# Altium PCB Power_Box_V0.PcbDoc (part 3 of 4)
Units mm, origin at the board's own origin, x right, y up, seen from the top; angles counter-clockwise.
Board outline 145 x 110 mm, 2 copper layers (Top Layer, Bottom Layer); 400 components, 300 nets, 1205 pads, 270 vias.
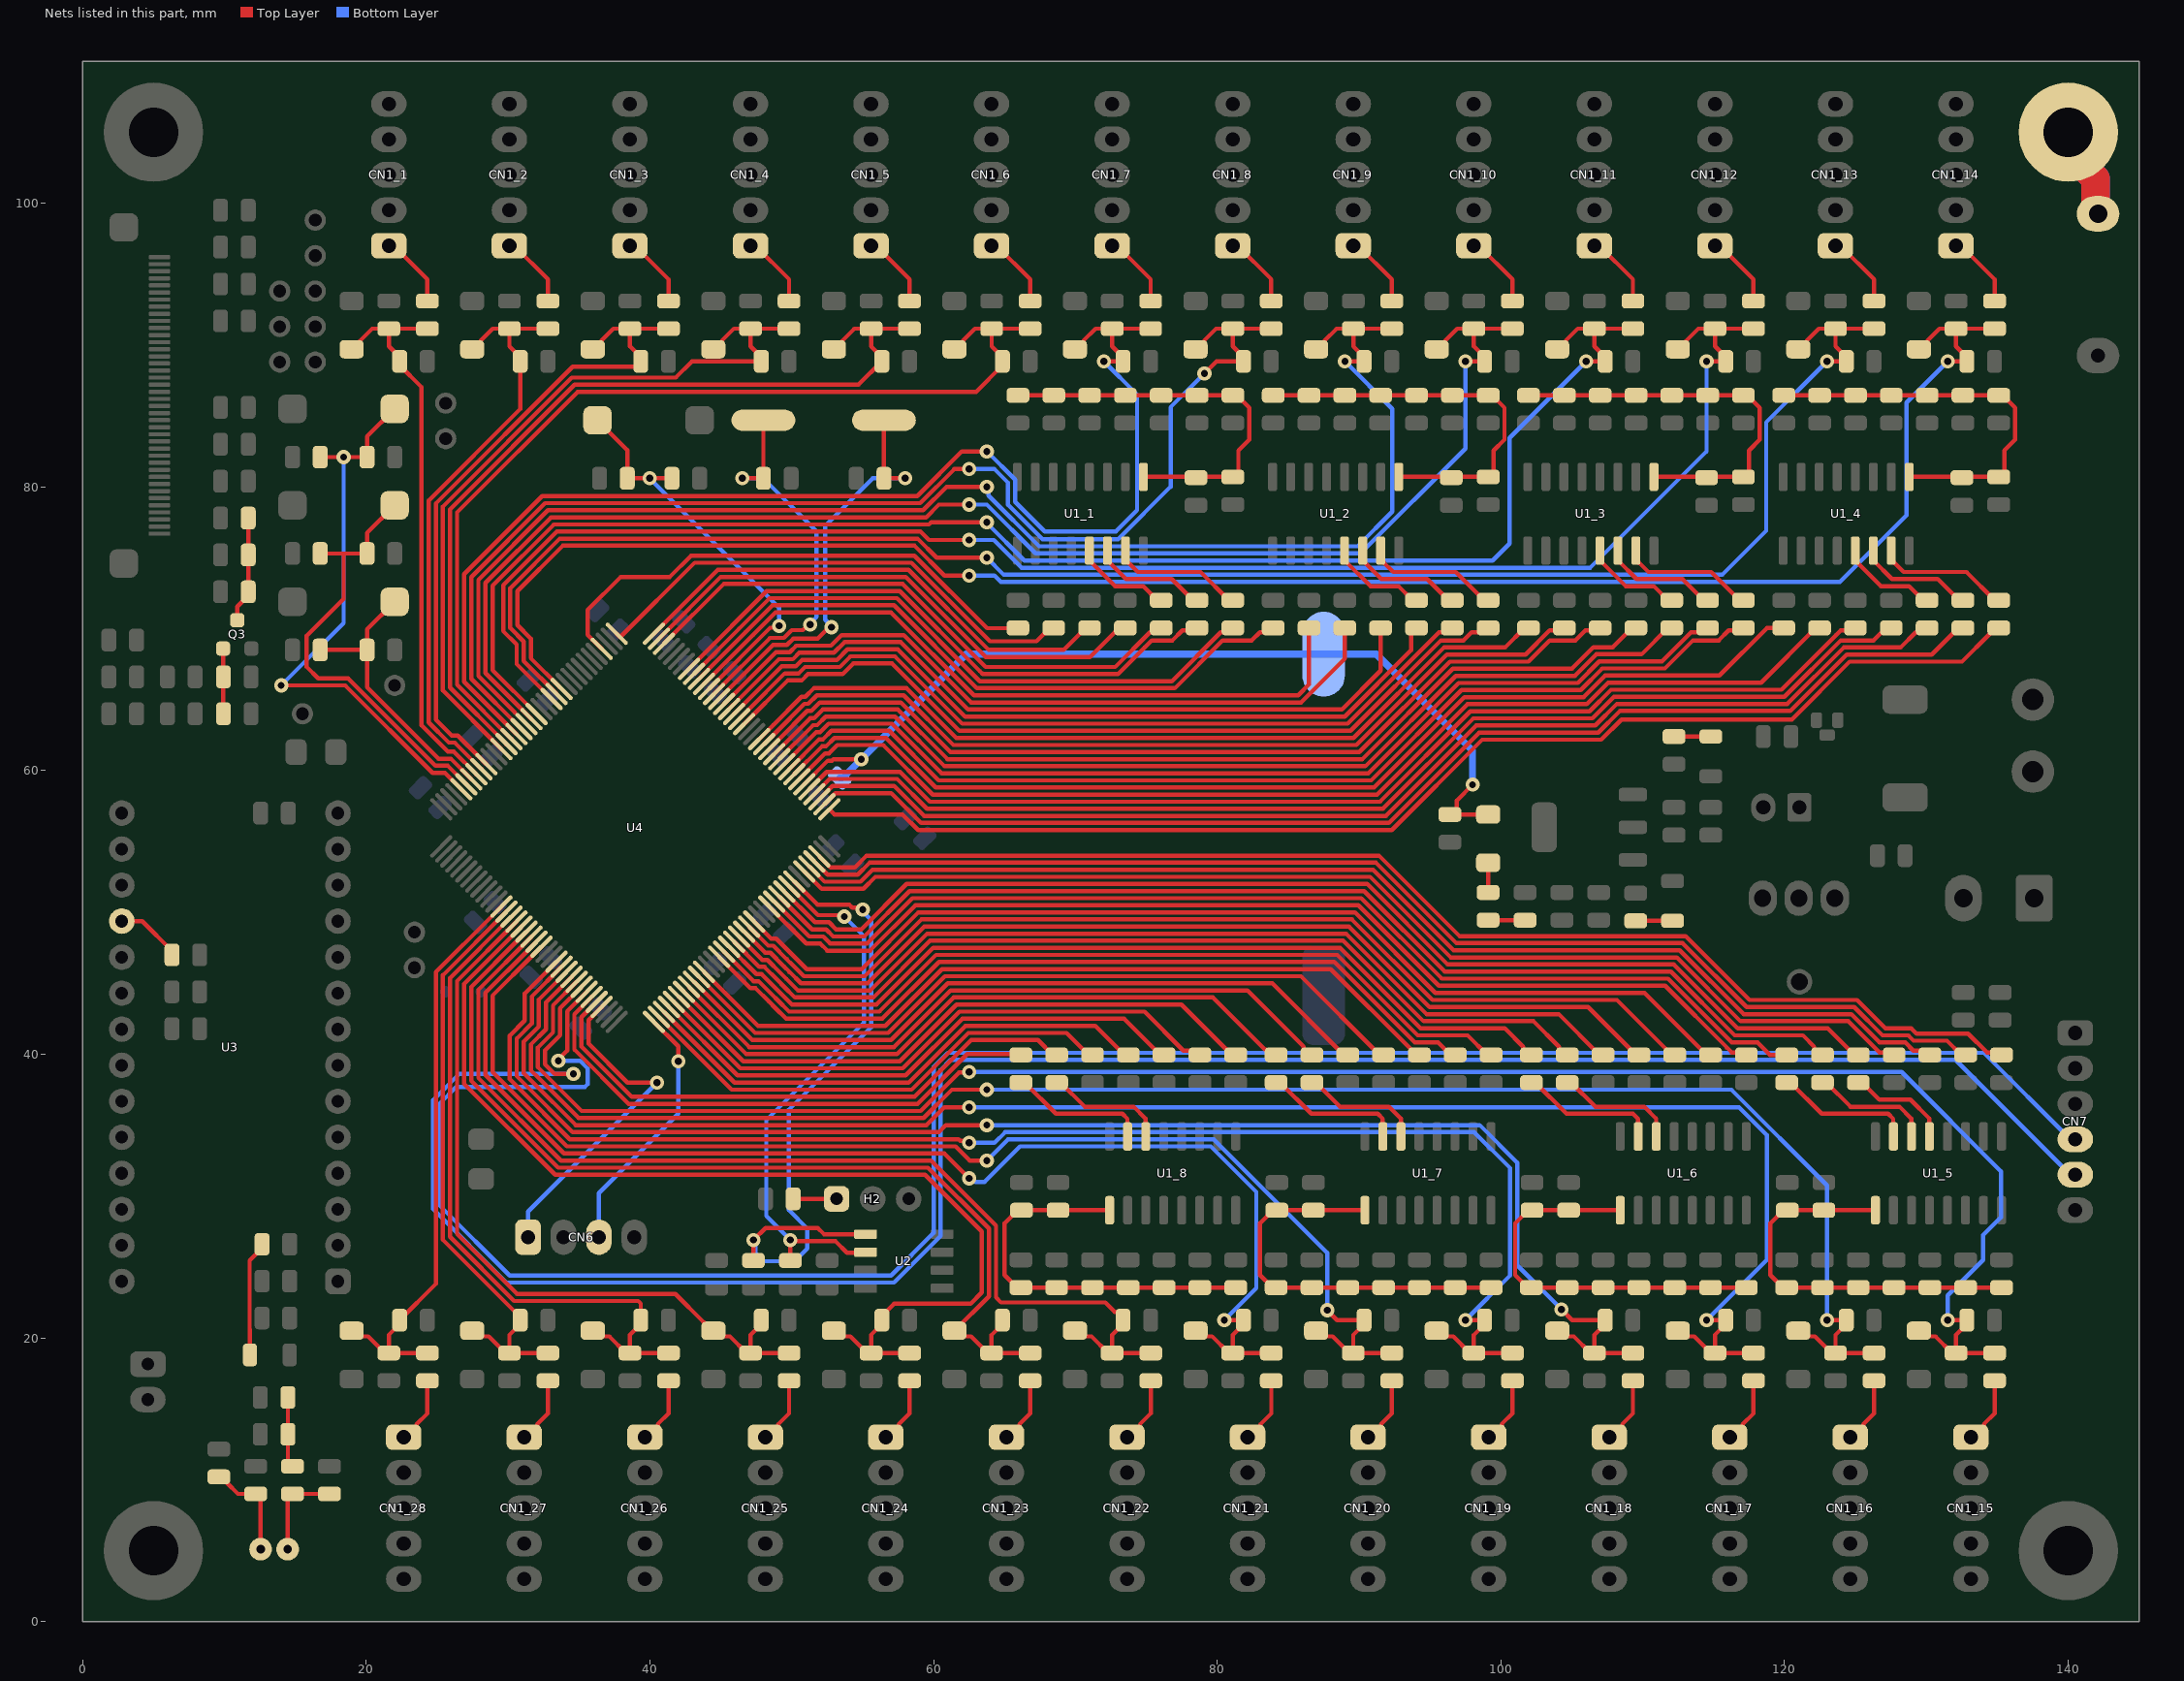
[diagram p3: the nets of this part, all layers, seen from the top]

## Via types
v1: diameter 1, hole 0.5, Top Layer to Bottom Layer, 270 vias

## Nets (pads, with @x,y where several pads share a name; then routed paths per layer and width w, separated by ;. In a path a pad name is that pad's centre, name@x,y a point inside that pad or via, vN(x,y) a via of type N, cw(c..) or ccw(c..) an arc to the next point about the centre after c; other vN are vias at no path point) (continued)
MCU_KEY1: C1_1.1 R1_1.2 S1_1.2 U4.68 | length 41.2
  Top Layer w0.3: v1(14,66) 18.509,66 24.675,59.835 25.545,59.835 U4.68@26.699,58.68 ; C1_1.1@16.75,82.1 v1(18.4,82.1) R1_1.2@20.05,82.1 20.05,83.55 S1_1.2@22,85.5
  Bottom Layer w0.3: v1(14,66) 18.4,70.4 v1(18.4,82.1)
MCU_KEY2: C1_2.1 R1_2.2 S1_2.2 U4.67 | length 31.3
  Top Layer w0.3: C1_2.1@16.75,75.3 18.4,75.3 ; S1_2.2@22,78.7 20.05,76.75 R1_2.2@20.05,75.3 18.4,75.3 ; U4.67@27.052,59.034 25.752,60.335 24.882,60.335 18.716,66.5 16.6,66.5 15.8,67.3 15.8,69.5 18.4,72.1 18.4,75.3
MCU_KEY3: C1_3.1 R1_3.2 S1_3.2 U4.66 | length 20.2
  Top Layer w0.3: C1_3.1@16.75,68.5 R1_3.2@20.05,68.5 ; S1_3.2@22,71.9 20.05,69.95 R1_3.2@20.05,68.5 ; U4.66@27.406,59.387 25.959,60.835 25.089,60.835 20.05,65.873 R1_3.2@20.05,68.5
MCU_LED1: R10_1.2 U4.37 | length 35.8
  Top Layer w0.3: U4.37@37.659,69.64 37.9,69.4 43.15,74.65 58.443,74.65 63.979,69.114 67.262,69.114 68.198,70.05 R10_1.2@68.473,70.05
MCU_LED2: R6_1.2 U4.35 | length 37.9
  Top Layer w0.3: U4.35@40.629,69.287 44.992,73.65 58.029,73.65 63.679,68 71.022,68 72.767,69.744 72.878,69.744 73.184,70.05 R6_1.2@73.524,70.05
MCU_LED3: R4_1.2 U4.29 | length 41.9
  Top Layer w0.3: U4.29@42.75,67.166 45.757,70.172 45.757,70.18 48.227,72.65 57.614,72.65 63.264,67 63.464,66.8 73.007,66.8 74.882,68.675 75.382,69.175 76.837,69.175 77.538,69.876 78.397,69.876 R4_1.2@78.571,70.05
MCU_LED4: R31_2.2 U4.27 | length 46.8
  Top Layer w0.3: U4.27@43.457,66.458 46.757,69.758 46.757,69.766 48.641,71.65 57.2,71.65 63.05,65.8 77.007,65.8 80.382,69.175 82.425,69.175 83,69.75 83.642,69.75 R31_2.2@83.942,70.05
MCU_LED5: R9_2.2 U4.22 | length 51.2
  Top Layer w0.3: U4.22@45.225,64.691 48.884,68.35 49.866,68.35 50.316,68.8 52.77,68.8 53.52,69.55 57.886,69.55 62.636,64.8 85.907,64.8 88.994,67.887 R9_2.2@88.994,70.05
MCU_LED6: R5_2.2 U4.20 | length 55.3
  Top Layer w0.3: U4.20@45.932,63.984 46.569,64.62 49.299,67.35 50.28,67.35 50.73,67.8 53.184,67.8 53.934,68.55 57.472,68.55 62.222,63.8 88.986,63.8 93.658,68.471 93.658,69.684 94.024,70.05 R5_2.2@94.045,70.05
MCU_LED7: R3_2.2 U4.18 | length 59.2
  Top Layer w0.3: U4.18@46.639,63.276 49.713,66.35 50.695,66.35 51.145,66.8 53.598,66.8 54.348,67.55 57.058,67.55 61.808,62.8 89.401,62.8 95.776,69.175 97.362,69.175 97.932,69.744 98.791,69.744 R3_2.2@99.097,70.05
MCU_LED8: R10_3.2 U4.14 | length 62.7
  Top Layer w0.3: U4.14@48.054,61.862 48.897,62.706 50.891,64.7 51.166,64.7 51.766,65.3 57.893,65.3 61.393,61.8 89.815,61.8 96.19,68.175 101.733,68.175 103.434,69.876 104.294,69.876 R10_3.2@104.468,70.05
MCU_LED9: R6_3.2 U4.12 | length 67.3
  Top Layer w0.3: U4.12@48.761,61.155 51.306,63.7 51.58,63.7 52.18,64.3 57.479,64.3 60.979,60.8 90.229,60.8 96.604,67.175 105.004,67.175 106.523,68.695 107.889,68.695 109.245,70.05 R6_3.2@109.52,70.05
MCU_LED10: R4_3.2 U4.10 | length 72
  Top Layer w0.3: U4.10@49.468,60.448 51.72,62.7 51.994,62.7 52.594,63.3 57.065,63.3 60.565,59.8 90.643,59.8 97.018,66.175 105.418,66.175 106.938,67.695 111.356,67.695 113.406,69.744 114.266,69.744 R4_3.2@114.571,70.05
MCU_LED11: R31_4.2 U4.8 | length 76.9
  Top Layer w0.3: U4.8@50.175,59.741 52.134,61.7 52.409,61.7 53.009,62.3 56.651,62.3 60.151,58.8 91.057,58.8 97.432,65.175 105.832,65.175 107.352,66.695 115.408,66.695 118.763,70.05 R31_4.2@119.942,70.05
MCU_LED12: R9_4.2 U4.5 | length 80.2
  Top Layer w0.3: U4.5@51.236,58.68 52.458,59.902 57.634,59.902 59.737,57.8 91.472,57.8 97.847,64.175 106.247,64.175 107.766,65.695 119.779,65.695 123.618,69.534 123.96,69.876 124.82,69.876 R9_4.2@124.994,70.05
MCU_LED13: R5_4.2 U4.3 | length 84.8
  Top Layer w0.3: U4.3@51.943,57.973 52.872,58.902 57.22,58.902 59.322,56.8 91.886,56.8 98.261,63.175 106.661,63.175 108.18,64.695 120.193,64.695 124.173,68.675 128.175,68.675 129.244,69.744 129.74,69.744 R5_4.2@130.045,70.05
MCU_LED14: R3_4.2 U4.1 | length 89
  Top Layer w0.3: U4.1@52.65,57.266 53.016,56.9 57.808,56.9 58.908,55.8 92.3,55.8 98.675,62.175 107.075,62.175 108.5,63.6 120.512,63.6 124.587,67.675 132.508,67.675 134.447,69.614 134.883,70.05 R3_4.2@135.097,70.05
MCU_LED15: R10_5.2 U4.141 | length 87.5
  Top Layer w0.3: U4.141@51.589,53.589 52.518,52.66 54.638,52.66 55.479,53.5 91.193,53.5 96.868,47.825 112.813,47.825 117.313,43.325 124.902,43.325 126.902,41.325 128.721,41.325 129.096,40.95 131.45,40.95 132.45,39.95 R10_5.2@132.774,39.95
MCU_LED16: R6_5.2 U4.139 | length 82.9
  Top Layer w0.3: U4.139@50.882,52.882 52.104,51.66 55.053,51.66 55.893,52.5 90.779,52.5 96.454,46.825 112.399,46.825 116.899,42.325 124.488,42.325 126.689,40.124 127.549,40.124 R6_5.2@127.723,39.95
MCU_LED17: R4_5.2 U4.134 | length 81
  Top Layer w0.3: U4.134@49.114,51.114 51.428,48.8 52.416,48.8 52.916,48.3 55.107,48.3 58.307,51.5 90.364,51.5 96.04,45.825 111.985,45.825 116.485,41.325 121.296,41.325 122.09,40.531 122.09,40.316 122.457,39.95 R4_5.2@122.671,39.95
MCU_LED18: R31_6.2 U4.132 | length 75.9
  Top Layer w0.3: U4.132@48.407,50.407 51.014,47.8 52.002,47.8 52.502,47.3 55.521,47.3 58.721,50.5 89.95,50.5 95.625,44.825 111.57,44.825 115.929,40.466 116.271,40.124 117.131,40.124 R31_6.2@117.305,39.95
MCU_LED19: R9_6.2 U4.128 | length 72.3
  Top Layer w0.3: U4.128@46.993,48.993 48.336,47.65 48.695,47.65 49.645,46.7 50.045,46.3 50.845,45.5 55.136,45.5 59.136,49.5 89.493,49.5 95.168,43.825 108.175,43.825 111.603,40.397 111.603,40.386 112.039,39.95 R9_6.2@112.253,39.95
MCU_LED20: R5_6.2 U4.126 | length 67.7
  Top Layer w0.3: U4.126@46.286,48.286 47.922,46.65 48.28,46.65 49.23,45.7 49.63,45.3 50.43,44.5 55.55,44.5 59.55,48.5 89.079,48.5 94.754,42.825 104.075,42.825 106.95,39.95 R5_6.2@107.202,39.95
MCU_LED21: R3_6.2 U4.124 | length 63.2
  Top Layer w0.3: U4.124@45.579,47.579 47.507,45.65 47.866,45.65 48.816,44.7 49.216,44.3 50.016,43.5 55.964,43.5 59.964,47.5 88.664,47.5 94.339,41.825 100.275,41.825 101.569,40.531 101.569,40.316 101.936,39.95 R3_6.2@102.15,39.95
MCU_LED22: R10_7.2 U4.122 | length 58.1
  Top Layer w0.3: U4.122@44.872,46.872 47.093,44.65 47.452,44.65 48.402,43.7 48.802,43.3 49.602,42.5 56.378,42.5 60.378,46.5 88.25,46.5 93.925,40.825 95.568,40.825 96.443,39.95 R10_7.2@96.779,39.95
MCU_LED23: R6_7.2 U4.118 | length 53.9
  Top Layer w0.3: U4.118@43.457,45.457 47.415,41.5 56.792,41.5 60.792,45.5 85.902,45.5 91.452,39.95 R6_7.2@91.727,39.95
MCU_LED24: R4_7.2 U4.116 | length 49.4
  Top Layer w0.3: U4.116@42.75,44.75 47,40.5 57.207,40.5 61.207,44.5 82.126,44.5 86.095,40.531 86.095,40.316 86.462,39.95 R4_7.2@86.676,39.95
MCU_LED25: R31_8.2 U4.114 | length 44.3
  Top Layer w0.3: U4.114@42.043,44.043 46.586,39.5 57.621,39.5 61.621,43.5 77.48,43.5 81.03,39.95 R31_8.2@81.305,39.95
MCU_LED26: R9_8.2 U4.112 | length 39.6
  Top Layer w0.3: U4.112@41.336,43.336 46.172,38.5 58.035,38.5 62.035,42.5 73.428,42.5 75.978,39.95 R9_8.2@76.253,39.95
MCU_LED27: R5_8.2 U4.110 | length 35
  Top Layer w0.3: U4.110@40.629,42.629 45.758,37.5 58.449,37.5 62.449,41.5 69.377,41.5 70.927,39.95 R5_8.2@71.202,39.95
MCU_LED28: R3_8.2 U4.103 | length 38.8
  Top Layer w0.3: U4.103@35.891,44.043 34.75,42.902 34.669,42.821 34.669,40.331 38.5,36.5 58.863,36.5 62.374,40.011 66.089,40.011 R3_8.2@66.15,39.95
MCU_MAGNET1: C2_1.1 R7_1.2 R8_1.2 U4.65 ZD1_1.2 | length 40.2
  Top Layer w0.3: ZD1_1.2@18.968,89.7 19.073,89.7 19.56,90.187 19.56,90.292 20.418,91.15 C2_1.1@21.591,91.15 ; R8_1.2@24.305,91.15 C2_1.1@21.591,91.15 ; U4.65@27.76,59.741 26.166,61.335 25.749,61.335 23.9,63.184 23.9,87.025 22.35,88.575 R7_1.2@22.35,88.85 22.35,89.14 21.591,89.899 C2_1.1@21.591,91.15
MCU_MAGNET2: C2_2.1 R7_2.2 R8_2.2 U4.64 ZD1_2.2 | length 41.8
  Top Layer w0.3: ZD1_2.2@27.468,89.7 27.573,89.7 28.06,90.187 28.06,90.292 28.918,91.15 C2_2.1@30.091,91.15 ; U4.64@28.113,60.094 26.235,61.972 25.819,61.972 24.4,63.391 24.4,79.028 30.85,85.478 30.85,89.14 30.091,89.899 C2_2.1@30.091,91.15 ; R8_2.2@32.805,91.15 C2_2.1@30.091,91.15
MCU_MAGNET3: C2_3.1 R7_3.2 R8_3.2 U4.63 ZD1_3.2 | length 47.4
  Top Layer w0.3: U4.63@28.467,60.448 26.442,62.472 26.026,62.472 24.9,63.598 24.9,78.821 34.541,88.463 39.177,88.463 39.35,88.636 39.35,89.14 38.591,89.899 C2_3.1@38.591,91.15 ; ZD1_3.2@35.968,89.7 36.073,89.7 36.56,90.187 36.56,90.292 37.418,91.15 C2_3.1@38.591,91.15 ; R8_3.2@41.305,91.15 C2_3.1@38.591,91.15
MCU_MAGNET4: C2_4.1 R7_4.2 R8_4.2 U4.60 ZD1_4.2 | length 53.8
  Top Layer w0.3: U4.60@29.527,61.509 25.4,65.636 25.4,78.614 34.486,87.7 41.193,87.7 41.816,87.7 42.966,88.85 R7_4.2@47.85,88.85 ; ZD1_4.2@44.468,89.7 44.573,89.7 45.06,90.187 45.06,90.292 45.918,91.15 C2_4.1@47.091,91.15 ; R7_4.2@47.85,89.14 47.091,89.899 C2_4.1@47.091,91.15 ; R8_4.2@49.805,91.15 C2_4.1@47.091,91.15
MCU_MAGNET5: C2_5.1 R7_5.2 R8_5.2 U4.59 ZD1_5.2 | length 61.6
  Top Layer w0.3: U4.59@29.881,61.862 25.9,65.843 25.9,78.407 34.693,87.2 54.7,87.2 R7_5.2@56.35,88.85 56.35,89.14 55.591,89.899 C2_5.1@55.591,91.15 54.418,91.15 53.56,90.292 53.56,90.187 53.073,89.7 ZD1_5.2@52.968,89.7 ; C2_5.1@55.591,91.15 R8_5.2@58.305,91.15
MCU_MAGNET6: C2_6.1 R7_6.2 R8_6.2 U4.58 ZD1_6.2 | length 69.2
  Top Layer w0.3: U4.58@30.234,62.216 26.4,66.05 26.4,78.2 34.9,86.7 63,86.7 64.85,88.55 64.85,89.14 64.091,89.899 C2_6.1@64.091,91.15 ; ZD1_6.2@61.468,89.7 61.573,89.7 62.06,90.187 62.06,90.292 62.918,91.15 C2_6.1@64.091,91.15 ; R8_6.2@66.805,91.15 C2_6.1@64.091,91.15
MCU_MAGNET7: C2_7.1 R7_7.2 R8_7.2 U4.57 ZD1_7.2 | length 89.1
  Top Layer w0.3: U4.57@30.588,62.569 26.9,66.257 26.9,73.85 32.4,79.35 32.698,79.35 58.85,79.35 62,82.5 v1(63.75,82.5) ; ZD1_7.2@69.968,89.7 70.073,89.7 70.56,90.187 70.56,90.292 71.418,91.15 C2_7.1@72.591,91.15 ; v1(72,88.85) R7_7.2@73.35,88.85 73.35,89.14 72.591,89.899 C2_7.1@72.591,91.15 ; R8_7.2@75.305,91.15 C2_7.1@72.591,91.15
  Bottom Layer w0.3: v1(63.75,82.5) 65.75,80.5 65.75,78.943 67.843,76.85 72.847,76.85 74.345,78.348 74.345,86.505 v1(72,88.85)
MCU_MAGNET8: C2_8.1 R7_8.2 R8_8.2 U4.56 ZD1_8.2 | length 90
  Top Layer w0.3: U4.56@30.942,62.923 27.4,66.464 27.4,73.643 32.607,78.85 59.057,78.85 61.457,81.25 v1(62.5,81.25) ; ZD1_8.2@78.8,89.3 78.8,89.927 79.06,90.187 79.06,90.292 79.918,91.15 C2_8.1@81.091,91.15 ; v1(79.1,88) 79.95,88.85 R7_8.2@81.85,88.85 81.85,89.14 81.091,89.899 C2_8.1@81.091,91.15 ; R8_8.2@83.805,91.15 C2_8.1@81.091,91.15
  Bottom Layer w0.3: v1(62.5,81.25) 64.293,81.25 65.25,80.293 65.25,78.736 67.679,76.307 73.011,76.307 76.71,80.006 76.71,85.61 v1(79.1,88)
MCU_MAGNET9: C2_9.1 R7_9.2 R8_9.2 U4.55 ZD1_9.2 | length 102.6
  Top Layer w0.3: 30.491,64.08 27.9,66.672 27.9,73.436 32.814,78.35 33.112,78.35 59.264,78.35 60.914,80 v1(63.75,80) ; ZD1_9.2@86.968,89.7 87.073,89.7 87.56,90.187 87.56,90.292 88.418,91.15 C2_9.1@89.591,91.15 ; v1(89,88.85) R7_9.2@90.35,88.85 90.35,89.14 89.591,89.899 C2_9.1@89.591,91.15 ; R8_9.2@92.305,91.15 C2_9.1@89.591,91.15
  Bottom Layer w0.3: v1(63.75,80) 63.872,79.878 63.872,79.378 67.443,75.807 89.9,75.807 92.345,78.252 92.345,85.505 v1(89,88.85)
MCU_MAGNET10: C2_10.1 R7_10.2 R8_10.2 U4.54 ZD1_10.2 | length 102.9
  Top Layer w0.3: U4.54@31.649,63.63 28.4,66.879 28.4,73.228 33.022,77.85 33.32,77.85 59.471,77.85 60.371,78.75 v1(62.5,78.75) ; ZD1_10.2@95.468,89.7 95.573,89.7 96.06,90.187 96.06,90.292 96.918,91.15 C2_10.1@98.091,91.15 ; v1(97.5,88.85) R7_10.2@98.85,88.85 98.85,89.14 98.091,89.899 C2_10.1@98.091,91.15 ; R8_10.2@100.805,91.15 C2_10.1@98.091,91.15
  Bottom Layer w0.3: v1(62.5,78.75) 63.75,78.75 67.193,75.307 90.107,75.307 97.5,82.7 v1(97.5,88.85)
MCU_MAGNET11: C2_11.1 R7_11.2 R8_11.2 U4.53 ZD1_11.2 | length 110.6
  Top Layer w0.3: U4.53@32.002,63.984 28.9,67.086 28.9,73.021 33.229,77.35 59.678,77.35 59.828,77.5 v1(63.75,77.5) ; ZD1_11.2@103.968,89.7 104.073,89.7 104.56,90.187 104.56,90.292 105.418,91.15 C2_11.1@106.591,91.15 ; v1(106,88.85) R7_11.2@107.35,88.85 107.35,89.14 106.591,89.899 C2_11.1@106.591,91.15 ; R8_11.2@109.305,91.15 C2_11.1@106.591,91.15
  Bottom Layer w0.3: v1(63.75,77.5) 63.75,77.457 66.4,74.807 99.407,74.807 100.6,76 100.6,83.45 v1(106,88.85)
MCU_MAGNET12: C2_12.1 R7_12.2 R8_12.2 U4.50 ZD1_12.2 | length 116.6
  Top Layer w0.3: U4.50@33.063,65.044 30.6,67.507 30.6,68.886 29.65,69.836 29.65,73.064 33.436,76.85 33.734,76.85 59.071,76.85 59.671,76.25 v1(62.5,76.25) ; ZD1_12.2@112.468,89.7 112.573,89.7 113.06,90.187 113.06,90.292 113.918,91.15 C2_12.1@115.091,91.15 ; v1(114.5,88.85) R7_12.2@115.85,88.85 115.85,89.14 115.091,89.899 C2_12.1@115.091,91.15 ; R8_12.2@117.805,91.15 C2_12.1@115.091,91.15
  Bottom Layer w0.3: v1(62.5,76.25) 64.25,76.25 66.2,74.3 106.297,74.3 114.5,82.503 v1(114.5,88.85)
MCU_MAGNET13: C2_13.1 R7_13.2 R8_13.2 U4.49 ZD1_13.2 | length 124.8
  Top Layer w0.3: U4.49@33.416,65.398 31.1,67.714 31.1,69.093 30.15,70.043 30.15,72.857 33.643,76.35 58.864,76.35 60.214,75 v1(63.75,75) ; ZD1_13.2@120.968,89.7 121.073,89.7 121.56,90.187 121.56,90.292 122.418,91.15 C2_13.1@123.591,91.15 ; v1(123,88.85) R7_13.2@124.35,88.85 124.35,89.14 123.591,89.899 C2_13.1@123.591,91.15 ; R8_13.2@126.305,91.15 C2_13.1@123.591,91.15
  Bottom Layer w0.3: v1(63.75,75) 64.95,73.8 115.6,73.8 118.7,76.9 118.7,84.55 v1(123,88.85)
MCU_MAGNET14: C2_14.1 R7_14.2 R8_14.2 U4.48 ZD1_14.2 | length 132.3
  Top Layer w0.3: U4.48@33.636,65.886 31.6,67.921 31.6,69.3 30.65,70.25 30.65,72.65 33.85,75.85 58.657,75.85 60.757,73.75 v1(62.5,73.75) ; ZD1_14.2@129.468,89.7 129.573,89.7 130.06,90.187 130.06,90.292 130.918,91.15 C2_14.1@132.091,91.15 ; v1(131.5,88.85) R7_14.2@132.85,88.85 132.85,89.14 132.091,89.899 C2_14.1@132.091,91.15 ; R8_14.2@134.805,91.15 C2_14.1@132.091,91.15
  Bottom Layer w0.3: v1(62.5,73.75) 64.293,73.75 64.743,73.3 123.9,73.3 128.6,78 128.6,85.95 v1(131.5,88.85)
MCU_MAGNET15: C2_15.1 R7_15.2 R8_15.2 U4.100 ZD1_15.2 | length 137.6
  Top Layer w0.3: U4.100@34.831,45.104 33.169,43.442 33.169,41.541 32.1,40.472 32.1,39.078 32.65,38.528 35.178,36 59.086,36 61.796,38.71 62.46,38.71 v1(62.5,38.75) ; ZD1_15.2@129.468,20.5 129.86,20.108 130.636,20.108 131.813,18.931 C2_15.1@132.088,18.931 ; v1(131.5,21.25) R7_15.2@132.85,21.25 132.85,20.966 132.088,20.204 C2_15.1@132.088,18.931 ; R8_15.2@134.808,18.931 C2_15.1@132.088,18.931
  Bottom Layer w0.3: v1(62.5,38.75) 128.25,38.75 135.25,31.75 135.25,28.5 134,27.25 134,25.493 131.5,22.993 v1(131.5,21.25)
MCU_MAGNET16: C2_16.1 R7_16.2 R8_16.2 U4.99 ZD1_16.2 | length 123.7
  Top Layer w0.3: U4.99@34.477,45.457 32.669,43.649 32.669,41.748 31.6,40.679 31.6,38.871 32.15,38.321 34.971,35.5 59.293,35.5 61.293,37.5 v1(63.75,37.5) ; ZD1_16.2@120.968,20.5 121.36,20.108 122.136,20.108 123.313,18.931 C2_16.1@123.588,18.931 ; v1(123,21.25) R7_16.2@124.35,21.25 124.35,20.966 123.588,20.204 C2_16.1@123.588,18.931 ; R8_16.2@126.308,18.931 C2_16.1@123.588,18.931
  Bottom Layer w0.3: v1(63.75,37.5) 116.25,37.5 123,30.75 v1(123,21.25)
MCU_MAGNET17: C2_17.1 R7_17.2 R8_17.2 U4.98 ZD1_17.2 | length 123.7
  Top Layer w0.3: U4.98@34.124,45.811 32.169,43.857 32.169,41.955 31.1,40.886 31.1,38.664 31.65,38.114 34.764,35 59.5,35 60.75,36.25 v1(62.5,36.25) ; ZD1_17.2@112.468,20.5 112.86,20.108 113.636,20.108 114.813,18.931 C2_17.1@115.088,18.931 ; v1(114.5,21.25) R7_17.2@115.85,21.25 115.85,20.966 115.088,20.204 C2_17.1@115.088,18.931 ; R8_17.2@117.808,18.931 C2_17.1@115.088,18.931
  Bottom Layer w0.3: v1(62.5,36.25) 116.793,36.25 118.75,34.293 118.75,25.5 v1(114.5,21.25)
MCU_MAGNET18: C2_18.1 R7_18.2 R8_18.2 U4.97 ZD1_18.2 | length 106.2
  Top Layer w0.3: U4.97@33.77,46.164 31.669,44.064 31.669,42.162 30.6,41.093 30.6,38.457 31.15,37.907 34.557,34.5 60.371,34.5 60.871,35 v1(63.75,35) ; ZD1_18.2@103.968,20.5 104.36,20.108 105.136,20.108 106.313,18.931 C2_18.1@106.588,18.931 ; v1(104.275,22) 105.025,21.25 R7_18.2@107.35,21.25 107.35,20.966 106.588,20.204 C2_18.1@106.588,18.931 ; R8_18.2@109.308,18.931 C2_18.1@106.588,18.931
  Bottom Layer w0.3: v1(63.75,35) 65,35 98.5,35 101.155,32.345 101.155,25.12 v1(104.275,22)
MCU_MAGNET19: C2_19.1 R7_19.2 R8_19.2 U4.96 ZD1_19.2 | length 105.4
  Top Layer w0.3: U4.96@33.416,46.518 31.169,44.271 31.169,42.369 30.1,41.3 30.1,38.25 30.65,37.7 34.35,34 61.755,34 61.871,33.884 62.366,33.884 v1(62.5,33.75) ; ZD1_19.2@95.468,20.5 95.86,20.108 96.636,20.108 97.813,18.931 C2_19.1@98.088,18.931 ; v1(97.5,21.25) R7_19.2@98.85,21.25 98.85,20.966 98.088,20.204 C2_19.1@98.088,18.931 ; R8_19.2@100.808,18.931 C2_19.1@98.088,18.931
  Bottom Layer w0.3: v1(62.5,33.75) 64.293,33.75 65.043,34.5 98.117,34.5 100.655,31.962 100.655,24.405 v1(97.5,21.25)
MCU_MAGNET20: C2_20.1 R7_20.2 R8_20.2 U4.93 ZD1_20.2 | length 91.2
  Top Layer w0.3: U4.93@32.356,47.579 31.719,46.942 28.9,44.123 28.9,38.743 34.143,33.5 61.548,33.5 62.548,32.5 v1(63.75,32.5) ; ZD1_20.2@86.968,20.5 87.36,20.108 88.136,20.108 89.313,18.931 C2_20.1@89.588,18.931 ; v1(87.75,21.95) 88.45,21.25 R7_20.2@90.35,21.25 90.35,20.966 89.588,20.204 C2_20.1@89.588,18.931 ; R8_20.2@92.308,18.931 C2_20.1@89.588,18.931
  Bottom Layer w0.3: v1(63.75,32.5) 65.25,34 79.75,34 87.75,26 v1(87.75,21.95)
MCU_MAGNET21: C2_21.1 R7_21.2 R8_21.2 U4.92 ZD1_21.2 | length 90.7
  Top Layer w0.3: U4.92@32.002,47.932 31.366,47.296 28.4,44.33 28.4,38.536 33.935,33 60.75,33 v1(62.5,31.25) ; ZD1_21.2@78.468,20.5 78.86,20.108 79.636,20.108 80.813,18.931 C2_21.1@81.088,18.931 ; v1(80.5,21.25) R7_21.2@81.85,21.25 81.85,20.966 81.088,20.204 C2_21.1@81.088,18.931 ; R8_21.2@83.808,18.931 C2_21.1@81.088,18.931
  Bottom Layer w0.3: v1(62.5,31.25) 62.689,31.25 62.939,31 63.6,31 66.1,33.5 79.543,33.5 82.75,30.293 82.75,23.5 v1(80.5,21.25)
MCU_MAGNET22: C2_22.1 R7_22.2 R8_22.2 U4.91 ZD1_22.2 | length 75.8
  Top Layer w0.3: U4.91@31.649,48.286 27.9,44.537 27.9,38.328 33.728,32.5 59.814,32.5 64.4,27.914 64.4,22.85 64.75,22.5 72.1,22.5 72.769,21.831 72.984,21.831 73.35,21.464 R7_22.2@73.35,21.25 73.35,20.966 72.588,20.204 C2_22.1@72.588,18.931 ; ZD1_22.2@69.968,20.5 70.36,20.108 71.136,20.108 72.313,18.931 C2_22.1@72.588,18.931 ; R8_22.2@75.308,18.931 C2_22.1@72.588,18.931
MCU_MAGNET23: C2_23.1 R7_23.2 R8_23.2 U4.90 ZD1_23.2 | length 69.8
  Top Layer w0.3: U4.90@31.295,48.639 30.659,48.003 27.4,44.744 27.4,38.121 33.521,32 59.607,32 63.9,27.707 63.9,22.932 ZD1_23.2@61.468,20.5 61.86,20.108 62.636,20.108 63.813,18.931 C2_23.1@64.088,18.931 ; R7_23.2@64.85,21.25 64.85,20.966 64.088,20.204 C2_23.1@64.088,18.931 ; R8_23.2@66.808,18.931 C2_23.1@64.088,18.931
MCU_MAGNET24: C2_24.1 R7_24.2 R8_24.2 U4.89 ZD1_24.2 | length 74.5
  Top Layer w0.3: U4.89@30.942,48.993 26.9,44.951 26.9,37.914 33.314,31.5 59.4,31.5 63.4,27.5 63.4,23.2 62.6,22.4 57.2,22.4 56.35,21.55 56.35,20.966 55.588,20.204 C2_24.1@55.588,18.931 ; ZD1_24.2@52.968,20.5 53.36,20.108 54.136,20.108 55.313,18.931 C2_24.1@55.588,18.931 ; R8_24.2@58.308,18.931 C2_24.1@55.588,18.931
MCU_MAGNET25: C2_25.1 R7_25.2 R8_25.2 U4.88 ZD1_25.2 | length 53.3
  Top Layer w0.3: U4.88@30.588,49.346 26.4,45.158 26.4,27.328 30.628,23.1 41.8,23.1 43.768,21.132 43.768,21.095 44.363,20.5 ZD1_25.2@44.468,20.5 44.86,20.108 45.636,20.108 46.813,18.931 C2_25.1@47.088,18.931 ; R7_25.2@47.85,21.25 47.85,20.966 47.088,20.204 C2_25.1@47.088,18.931 ; R8_25.2@49.808,18.931 C2_25.1@47.088,18.931
MCU_MAGNET26: C2_26.1 R7_26.2 R8_26.2 U4.87 ZD1_26.2 | length 49.6
  Top Layer w0.3: U4.87@30.234,49.7 25.9,45.366 25.9,27.121 30.421,22.6 39.174,22.6 39.35,22.424 39.35,20.966 38.588,20.204 C2_26.1@38.588,18.931 ; ZD1_26.2@35.968,20.5 36.36,20.108 37.136,20.108 38.313,18.931 C2_26.1@38.588,18.931 ; R8_26.2@41.308,18.931 C2_26.1@38.588,18.931
MCU_MAGNET27: C2_27.1 R7_27.2 R8_27.2 U4.86 ZD1_27.2 | length 41.5
  Top Layer w0.3: ZD1_27.2@27.468,20.5 27.86,20.108 28.636,20.108 29.813,18.931 C2_27.1@30.088,18.931 ; U4.86@29.881,50.054 25.4,45.573 25.4,26.914 30.85,21.464 30.85,20.966 30.088,20.204 C2_27.1@30.088,18.931 ; R8_27.2@32.808,18.931 C2_27.1@30.088,18.931
MCU_MAGNET28: C2_28.1 R7_28.2 R8_28.2 U4.85 ZD1_28.2 | length 40.8
  Top Layer w0.3: ZD1_28.2@18.968,20.5 19.36,20.108 20.136,20.108 21.313,18.931 C2_28.1@21.588,18.931 ; R8_28.2@24.308,18.931 C2_28.1@21.588,18.931 ; U4.85@29.527,50.407 28.891,49.771 24.9,45.78 24.9,23.8 R7_28.2@22.35,21.25 22.35,20.966 21.588,20.204 C2_28.1@21.588,18.931
MCU_NRST: C18.1 R28.1 S2.2 U4.25 | length 29.1
  Top Layer w0.3: S2.2@36.3,84.7 38.4,82.6 R28.1@38.4,80.6 v1(39.975,80.6) C18.1@41.55,80.6 ; U4.25@44.164,65.751 48.479,70.066 48.966,70.066 v1(49.1,70.2)
  Bottom Layer w0.3: v1(39.975,80.6) 49.1,71.475 v1(49.1,70.2)
MCU_OCS_N: C19.1 U4.23 Y2.1 | length 30
  Top Layer w0.3: U4.23@44.872,65.044 48.677,68.85 49.659,68.85 50.109,69.3 51.823,69.3 52.623,70.1 v1(52.8,70.1) ; Y2.1@56.5,84.7 C19.1@56.5,80.6 v1(58,80.6)
  Bottom Layer w0.3: v1(52.8,70.1) 52.8,70.176 52.35,70.626 52.35,77.25 55.7,80.6 v1(58,80.6)
MCU_OCS_P: C20.1 U4.24 Y2.2 | length 28
  Top Layer w0.3: U4.24@44.518,65.398 48.47,69.35 49.452,69.35 50.002,69.9 50.774,69.9 51.174,70.3 v1(51.3,70.3) ; v1(46.5,80.6) C20.1@48,80.6 Y2.2@48,84.7
  Bottom Layer w0.3: v1(46.5,80.6) 48,80.6 51.75,76.85 51.75,70.826 51.3,70.376 v1(51.3,70.3)
MCU_RELAY1: R31_1.2 U4.40 | length 37.4
  Top Layer w0.3: U4.40@36.598,68.58 35.6,69.578 35.6,71.307 37.943,73.65 41.4,73.65 42.9,75.15 58.65,75.15 63.768,70.032 65.477,70.032 65.703,69.806 R31_1.2@65.947,70.05
MCU_RELAY2: R9_1.2 U4.36 | length 35.6
  Top Layer w0.3: U4.36@40.275,69.64 44.785,74.15 58.236,74.15 63.886,68.5 69.174,68.5 70.724,70.05 R9_1.2@70.999,70.05
MCU_RELAY3: R5_1.2 U4.34 | length 40.4
  Top Layer w0.3: U4.34@40.982,68.933 45.199,73.15 57.822,73.15 63.672,67.3 72.8,67.3 75.244,69.744 75.74,69.744 R5_1.2@76.045,70.05
MCU_RELAY4: R3_1.2 U4.28 | length 44.2
  Top Layer w0.3: U4.28@43.104,66.812 46.257,69.965 46.257,69.973 48.434,72.15 57.407,72.15 63.257,66.3 76.8,66.3 80.244,69.744 80.791,69.744 R3_1.2@81.097,70.05
MCU_RELAY5: R10_2.2 U4.26 | length 51.5
  Top Layer w0.3: U4.26@43.811,66.105 47.257,69.551 47.257,69.559 48.848,71.15 56.993,71.15 62.843,65.3 85.7,65.3 86.468,66.068 R10_2.2@86.468,70.05
MCU_RELAY6: R6_2.2 U4.21 | length 54
  Top Layer w0.3: U4.21@45.579,64.337 46.215,64.974 49.092,67.85 50.073,67.85 50.523,68.3 52.977,68.3 53.727,69.05 57.679,69.05 62.429,64.3 88.779,64.3 91.52,67.04 R6_2.2@91.52,70.05
MCU_RELAY7: R4_2.2 U4.19 | length 56.9
  Top Layer w0.3: U4.19@46.286,63.63 46.922,64.266 49.506,66.85 50.488,66.85 50.938,67.3 53.391,67.3 54.141,68.05 57.265,68.05 62.015,63.3 89.193,63.3 95.638,69.744 96.266,69.744 R4_2.2@96.571,70.05
MCU_RELAY8: R31_3.2 U4.15 | length 60.4
  Top Layer w0.3: U4.15@47.7,62.216 48.69,63.206 50.684,65.2 50.959,65.2 51.559,65.8 58.101,65.8 61.601,62.3 89.608,62.3 95.983,68.675 100.292,68.675 101.667,70.05 R31_3.2@101.942,70.05
MCU_RELAY9: R9_3.2 U4.13 | length 65
  Top Layer w0.3: U4.13@48.407,61.509 49.104,62.206 51.098,64.2 51.373,64.2 51.973,64.8 57.686,64.8 61.186,61.3 90.022,61.3 96.397,67.675 101.94,67.675 103.44,69.175 105.259,69.175 105.96,69.876 106.82,69.876 R9_3.2@106.994,70.05
MCU_RELAY10: R5_3.2 U4.11 | length 69.7
  Top Layer w0.3: U4.11@49.114,60.802 51.513,63.2 51.787,63.2 52.387,63.8 57.272,63.8 60.772,60.3 90.436,60.3 96.811,66.675 105.211,66.675 106.731,68.195 109.915,68.195 111.77,70.05 R5_3.2@112.045,70.05
MCU_RELAY11: R3_3.2 U4.9 | length 74.3
  Top Layer w0.3: U4.9@49.821,60.094 51.927,62.2 52.202,62.2 52.802,62.8 56.858,62.8 60.358,59.3 90.85,59.3 97.225,65.675 105.625,65.675 107.145,67.195 111.563,67.195 113.544,69.175 115.362,69.175 116.063,69.876 116.923,69.876 R3_3.2@117.097,70.05
MCU_RELAY12: R10_4.2 U4.7 | length 79.3
  Top Layer w0.3: U4.7@50.528,59.387 52.341,61.2 52.616,61.2 53.216,61.8 56.444,61.8 59.944,58.3 91.265,58.3 97.64,64.675 106.04,64.675 107.559,66.195 118.337,66.195 122.193,70.05 R10_4.2@122.468,70.05
MCU_RELAY13: R6_4.2 U4.4 | length 82.5
  Top Layer w0.3: U4.4@51.589,58.327 52.665,59.402 57.427,59.402 59.53,57.3 91.679,57.3 98.054,63.675 106.454,63.675 107.973,65.195 119.986,65.195 123.966,69.175 126.275,69.175 126.775,69.675 126.809,69.675 127.184,70.05 R6_4.2@127.52,70.05
MCU_RELAY14: R4_4.2 U4.2 | length 87.2
  Top Layer w0.3: U4.2@52.296,57.62 53.079,58.402 57.013,58.402 59.115,56.3 92.093,56.3 98.468,62.675 106.868,62.675 108.387,64.195 120.4,64.195 124.38,68.175 130.376,68.175 131.7,69.499 132.251,70.05 R4_4.2@132.571,70.05
MCU_RELAY15: R31_5.2 U4.142 | length 89.8
  Top Layer w0.3: U4.142@51.943,53.943 52.725,53.16 54.431,53.16 55.272,54 91.4,54 97.075,48.325 113.02,48.325 117.52,43.825 125.109,43.825 127.109,41.825 128.928,41.825 129.303,41.45 132.94,41.45 134.266,40.124 135.126,40.124 R31_5.2@135.3,39.95
MCU_RELAY16: R9_5.2 U4.140 | length 85.2
  Top Layer w0.3: U4.140@51.236,53.236 52.311,52.16 54.846,52.16 55.686,53 90.986,53 96.661,47.325 112.606,47.325 117.106,42.825 124.695,42.825 126.695,40.825 128.514,40.825 129.083,40.256 129.943,40.256 R9_5.2@130.248,39.95
MCU_RELAY17: R5_5.2 U4.135 | length 83.2
  Top Layer w0.3: U4.135@49.468,51.468 51.636,49.3 52.623,49.3 53.123,48.8 54.9,48.8 58.1,52 90.572,52 96.247,46.325 112.192,46.325 116.692,41.825 123.047,41.825 124.922,39.95 R5_5.2@125.197,39.95
MCU_RELAY18: R3_5.2 U4.133 | length 78.5
  Top Layer w0.3: U4.133@48.761,50.761 51.221,48.3 52.209,48.3 52.709,47.8 55.314,47.8 58.514,51 90.157,51 95.832,45.325 111.777,45.325 116.277,40.825 118.096,40.825 118.971,39.95 R3_5.2@120.145,39.95
MCU_RELAY19: R10_6.2 U4.129 | length 74.6
  Top Layer w0.3: U4.129@47.346,49.346 48.543,48.15 48.902,48.15 51.052,46 54.928,46 58.928,50 89.7,50 95.375,44.325 110.129,44.325 114.504,39.95 R10_6.2@114.779,39.95
MCU_RELAY20: R6_6.2 U4.127 | length 70
  Top Layer w0.3: U4.127@46.639,48.639 48.129,47.15 48.488,47.15 49.438,46.2 49.838,45.8 50.638,45 55.343,45 59.343,49 89.286,49 94.961,43.325 106.138,43.325 109.077,40.386 109.513,39.95 R6_6.2@109.727,39.95
MCU_RELAY21: R4_6.2 U4.125 | length 65.5
  Top Layer w0.3: U4.125@45.932,47.932 47.714,46.15 48.073,46.15 49.023,45.2 49.423,44.8 50.223,44 55.757,44 59.757,48 88.872,48 94.547,42.325 102.301,42.325 104.095,40.531 104.095,40.316 104.462,39.95 R4_6.2@104.676,39.95
MCU_RELAY22: R31_7.2 U4.123 | length 60.4
  Top Layer w0.3: U4.123@45.225,47.225 47.3,45.15 47.659,45.15 48.609,44.2 49.009,43.8 49.809,43 56.171,43 60.171,47 88.457,47 94.132,41.325 97.655,41.325 99.03,39.95 R31_7.2@99.305,39.95
MCU_RELAY23: R9_7.2 U4.119 | length 56.2
  Top Layer w0.3: U4.119@43.811,45.811 47.622,42 56.585,42 60.585,46 86.122,46 88,46 93.603,40.397 93.603,40.386 94.039,39.95 R9_7.2@94.253,39.95
MCU_RELAY24: R5_7.2 U4.117 | length 51.5
  Top Layer w0.3: U4.117@43.104,45.104 47.208,41 56.999,41 60.999,45 83.877,45 88.927,39.95 R5_7.2@89.202,39.95
MCU_RELAY25: R3_7.2 U4.115 | length 46.9
  Top Layer w0.3: U4.115@42.397,44.397 46.793,40 57.414,40 61.414,44 79.7,44 83.375,40.325 83.439,40.325 83.814,39.95 R3_7.2@84.15,39.95
MCU_RELAY26: R10_8.2 U4.113 | length 42
  Top Layer w0.3: U4.113@41.69,43.69 46.379,39 57.828,39 61.828,43 74.87,43 77.614,40.256 78.474,40.256 R10_8.2@78.779,39.95
MCU_RELAY27: R6_8.2 U4.111 | length 37.3
  Top Layer w0.3: U4.111@40.982,42.982 45.965,38 58.242,38 62.242,42 71.402,42 73.452,39.95 R6_8.2@73.727,39.95
MCU_RELAY28: R4_8.2 U4.104 | length 40.7
  Top Layer w0.3: U4.104@36.245,43.69 35.169,42.614 35.169,40.538 38.707,37 58.656,37 62.656,41 67.351,41 68.401,39.95 R4_8.2@68.676,39.95
MCU_RXD: CN7.4 U4.102 | length 160.5
  Top Layer w0.3: v1(33.544,39.544) 33.544,39.636 34.169,40.262 34.169,43.028 U4.102@35.538,44.397
  Bottom Layer w0.3: v1(33.544,39.544) 35.058,39.544 35.6,39.002 35.6,37.876 35.424,37.7 26.351,37.7 25.2,36.549 25.2,29.3 30.1,24.4 57,24.4 60,27.4 60,39.107 60.993,40.1 134.05,40.1 140.15,34 CN7.4@140.5,34
MCU_SCL: R11.1 U2.6 U4.136 | length 38.8
  Top Layer w0.3: U4.136@49.821,51.821 51.843,49.8 53.6,49.8 v1(53.7,49.7) ; R11.1@49.9,25.45 v1(49.9,26.9) 49.99,26.81 53.09,26.81 53.9,26 55.16,26 U2.6@55.2,26.04
  Bottom Layer w0.3: v1(49.9,26.9) 48.2,28.6 48.2,35.351 55.1,42.251 55.1,48.3 v1(53.7,49.7)
MCU_SDA: R12.1 U2.5 U4.137 | length 47.9
  Top Layer w0.3: R12.1@47.3,25.45 v1(47.3,26.9) 48.15,27.75 51.829,27.75 52.269,27.31 U2.5@55.2,27.31 ; U4.137@50.175,52.175 51.8,50.55 54.052,50.55 54.268,50.334 54.866,50.334 v1(55,50.2)
  Bottom Layer w0.3: v1(47.3,26.9) 47.434,26.766 47.434,25.966 48,25.4 50.2,25.4 51.1,26.3 51.1,27.7 49.8,29 49.8,36.1 55.6,41.9 55.6,49.457 55,50.056 v1(55,50.2)
MCU_SWCLK: CN6.3 U4.109 | length 18.2
  Top Layer w0.3: U4.109@40.275,42.275 42,40.551 v1(42,39.5)
  Bottom Layer w0.3: CN6.3@36.4,27.1 36.4,30.2 42,35.8 v1(42,39.5)
MCU_SWDIO: CN6.1 U4.105 | length 23.6
  Top Layer w0.3: U4.105@36.598,43.336 35.669,42.407 35.669,40.745 38.414,38 v1(40.5,38)
  Bottom Layer w0.3: CN6.1@31.4,27.1 31.4,28.9 v1(40.5,38)
MCU_TXD: CN7.5 U4.101 | length 161.8
  Top Layer w0.3: v1(34.6,38.6) 33.285,38.6 32.6,39.285 32.6,40.264 33.669,41.334 33.669,43.235 U4.101@35.184,44.75
  Bottom Layer w0.3: v1(34.6,38.6) 26.544,38.6 24.7,36.756 24.7,29.093 29.893,23.9 30.4,23.9 57.207,23.9 60.5,27.193 60.5,38.9 61.2,39.6 132.05,39.6 140.15,31.5 CN7.5@140.5,31.5
MCU_VBAT: BAT1.1 C3.2 C41.2 D1.2 U4.6 | length 63.6
  Top Layer w0.3: U4.6@50.882,59.034 52.548,60.7 52.823,60.7 52.923,60.8 v1(54.9,60.8) ; C3.2@96.4,56.9 C3.2@96.509,56.9 ; v1(98,59) 96.875,57.875 96.875,57.266 C3.2@96.509,56.9 ; D1.2@99.1,56.9 C3.2@96.509,56.9
  Bottom Layer w0.5: C41.2@53.379,59.479 53.579,59.479 v1(54.9,60.8) 62.3,68.2 91.2,68.2 98,61.4 v1(98,59)
NetC5_1: C5.1 R14.1 R15.2 | length 5
  Top Layer w0.3: R14.1@14.475,15.8 C5.1@14.475,13.2 14.475,11.275 R15.2@14.8,10.95
NetC6_1: C6.1 MIC1.1 R15.1 | length 6.6
  Top Layer w0.3: MIC1.1@14.45,5.1 14.45,8.65 R15.1@14.8,9 C6.1@17.4,9
NetC7_1: C7.1 MIC1.2 R17.2 | length 7.2
  Top Layer w0.3: C7.1@9.6,10.2 9.814,10.2 10.181,9.834 10.181,9.769 10.95,9 R17.2@12.2,9 12.55,8.65 MIC1.2@12.55,5.1
NetC8_1: C8.1 U3.18 | length 4.7
  Top Layer w0.3: U3.18@2.76,49.38 4.195,49.38 6.3,47.275 C8.1@6.3,47
NetC46_1: C46.1 SC2.1 | length 13.2
  Top Layer w2: SC2.1@140,105 140,103.647 141.918,101.729 141.918,99.432 C46.1@142.1,99.25
  Bottom Layer w2: SC2.1@140,105 140,103.647 141.918,101.729 141.918,99.432 C46.1@142.1,99.25
NetC47_1_2: C47_1.2 FB6_1.2 R32_1.2 R33_1.2 R34_1.2 R35_1.2 R36_1.2 R38_1.2 R39_1.2 U1_1.9 | length 28.3
  Top Layer w0.3: R32_1.2@65.945,86.45 R33_1.2@68.471,86.45 R34_1.2@70.997,86.45 R35_1.2@73.523,86.45 R36_1.2@76.048,86.45 R38_1.2@78.574,86.45 R39_1.2@81.1,86.45 81.375,86.45 82.25,85.575 82.25,83.326 81.488,82.564 81.488,81.066 81.121,80.7 FB6_1.2@81.1,80.7 U1_1.9@74.79,80.7
NetC47_2_2: C47_2.2 FB6_2.2 R32_2.2 R33_2.2 R34_2.2 R35_2.2 R36_2.2 R38_2.2 R39_2.2 U1_2.9 | length 28.3
  Top Layer w0.3: R32_2.2@83.945,86.45 R33_2.2@86.471,86.45 R34_2.2@88.997,86.45 R35_2.2@91.523,86.45 R36_2.2@94.048,86.45 R38_2.2@96.574,86.45 R39_2.2@99.1,86.45 99.375,86.45 100.25,85.575 100.25,83.326 99.488,82.564 99.488,81.066 99.121,80.7 FB6_2.2@99.1,80.7 U1_2.9@92.79,80.7
NetC47_3_2: C47_3.2 FB6_3.2 R32_3.2 R33_3.2 R34_3.2 R35_3.2 R36_3.2 R38_3.2 R39_3.2 U1_3.9 | length 28.3
  Top Layer w0.3: R32_3.2@101.945,86.45 R33_3.2@104.471,86.45 R34_3.2@106.997,86.45 R35_3.2@109.523,86.45 R36_3.2@112.048,86.45 R38_3.2@114.574,86.45 R39_3.2@117.1,86.45 117.375,86.45 118.25,85.575 118.25,83.326 117.488,82.564 117.488,81.066 117.121,80.7 FB6_3.2@117.1,80.7 U1_3.9@110.79,80.7
NetC47_4_2: C47_4.2 FB6_4.2 R32_4.2 R33_4.2 R34_4.2 R35_4.2 R36_4.2 R38_4.2 R39_4.2 U1_4.9 | length 28.3
  Top Layer w0.3: R32_4.2@119.945,86.45 R33_4.2@122.471,86.45 R34_4.2@124.997,86.45 R35_4.2@127.523,86.45 R36_4.2@130.048,86.45 R38_4.2@132.574,86.45 R39_4.2@135.1,86.45 135.375,86.45 136.25,85.575 136.25,83.326 135.488,82.564 135.488,81.066 135.121,80.7 FB6_4.2@135.1,80.7 U1_4.9@128.79,80.7
NetC47_5_2: C47_5.2 FB6_5.2 R32_5.2 R33_5.2 R34_5.2 R35_5.2 R36_5.2 R38_5.2 R39_5.2 U1_5.9 | length 28.1
  Top Layer w0.3: U1_5.9@126.405,29 C47_5.2@122.77,29 FB6_5.2@120.195,29 119.92,29 118.995,28.075 118.995,24.425 119.87,23.55 R39_5.2@120.145,23.55 R32_5.2@135.3,23.55
NetC47_6_2: C47_6.2 FB6_6.2 R32_6.2 R33_6.2 R34_6.2 R35_6.2 R36_6.2 R38_6.2 R39_6.2 U1_6.9 | length 28.1
  Top Layer w0.3: U1_6.9@108.41,29 C47_6.2@104.775,29 FB6_6.2@102.2,29 101.925,29 101,28.075 101,24.425 101.875,23.55 R39_6.2@102.15,23.55 R32_6.2@117.305,23.55
NetC47_7_2: C47_7.2 FB6_7.2 R32_7.2 R33_7.2 R34_7.2 R35_7.2 R36_7.2 R38_7.2 R39_7.2 U1_7.9 | length 28.1
  Top Layer w0.3: U1_7.9@90.41,29 C47_7.2@86.775,29 FB6_7.2@84.2,29 83.925,29 83,28.075 83,24.425 83.875,23.55 R39_7.2@84.15,23.55 R32_7.2@99.305,23.55
NetC47_8_2: C47_8.2 FB6_8.2 R32_8.2 R33_8.2 R34_8.2 R35_8.2 R36_8.2 R38_8.2 R39_8.2 U1_8.9 | length 28.1
  Top Layer w0.3: U1_8.9@72.41,29 C47_8.2@68.775,29 FB6_8.2@66.2,29 65.925,29 65,28.075 65,24.425 65.875,23.55 R39_8.2@66.15,23.55 R32_8.2@81.305,23.55
NetCN1_1_1: CN1_1.1 R8_1.1 | length 5.2
  Top Layer w0.3: CN1_1.1@21.587,97 21.937,97 24.305,94.632 R8_1.1@24.305,93.1
NetCN1_2_1: CN1_2.1 R8_2.1 | length 5.2
  Top Layer w0.3: CN1_2.1@30.087,97 30.437,97 32.805,94.632 R8_2.1@32.805,93.1
NetCN1_3_1: CN1_3.1 R8_3.1 | length 5.2
  Top Layer w0.3: CN1_3.1@38.587,97 38.937,97 41.305,94.632 R8_3.1@41.305,93.1
NetCN1_4_1: CN1_4.1 R8_4.1 | length 5.2
  Top Layer w0.3: CN1_4.1@47.087,97 47.437,97 49.805,94.632 R8_4.1@49.805,93.1
NetCN1_5_1: CN1_5.1 R8_5.1 | length 5.2
  Top Layer w0.3: CN1_5.1@55.587,97 55.937,97 58.305,94.632 R8_5.1@58.305,93.1
NetCN1_6_1: CN1_6.1 R8_6.1 | length 5.2
  Top Layer w0.3: CN1_6.1@64.087,97 64.437,97 66.805,94.632 R8_6.1@66.805,93.1
NetCN1_7_1: CN1_7.1 R8_7.1 | length 5.2
  Top Layer w0.3: CN1_7.1@72.587,97 72.937,97 75.305,94.632 R8_7.1@75.305,93.1
NetCN1_8_1: CN1_8.1 R8_8.1 | length 5.2
  Top Layer w0.3: CN1_8.1@81.087,97 81.437,97 83.805,94.632 R8_8.1@83.805,93.1
NetCN1_9_1: CN1_9.1 R8_9.1 | length 5.2
  Top Layer w0.3: CN1_9.1@89.587,97 89.937,97 92.305,94.632 R8_9.1@92.305,93.1
NetCN1_10_1: CN1_10.1 R8_10.1 | length 5.2
  Top Layer w0.3: CN1_10.1@98.087,97 98.437,97 100.805,94.632 R8_10.1@100.805,93.1
NetCN1_11_1: CN1_11.1 R8_11.1 | length 5.2
  Top Layer w0.3: CN1_11.1@106.587,97 106.937,97 109.305,94.632 R8_11.1@109.305,93.1
NetCN1_12_1: CN1_12.1 R8_12.1 | length 5.2
  Top Layer w0.3: CN1_12.1@115.087,97 115.437,97 117.805,94.632 R8_12.1@117.805,93.1
NetCN1_13_1: CN1_13.1 R8_13.1 | length 5.2
  Top Layer w0.3: CN1_13.1@123.587,97 123.937,97 126.305,94.632 R8_13.1@126.305,93.1
NetCN1_14_1: CN1_14.1 R8_14.1 | length 5.2
  Top Layer w0.3: CN1_14.1@132.087,97 132.437,97 134.805,94.632 R8_14.1@134.805,93.1
NetCN1_15_1: CN1_15.1 R8_15.1 | length 4.8
  Top Layer w0.3: CN1_15.1@133.137,13 133.325,13 134.052,13.727 134.052,13.915 134.808,14.671 R8_15.1@134.808,16.981
NetCN1_16_1: CN1_16.1 R8_16.1 | length 4.8
  Top Layer w0.3: CN1_16.1@124.637,13 124.825,13 125.552,13.727 125.552,13.915 126.308,14.671 R8_16.1@126.308,16.981
NetCN1_17_1: CN1_17.1 R8_17.1 | length 4.8
  Top Layer w0.3: CN1_17.1@116.137,13 116.325,13 117.052,13.727 117.052,13.915 117.808,14.671 R8_17.1@117.808,16.981
NetCN1_18_1: CN1_18.1 R8_18.1 | length 4.8
  Top Layer w0.3: CN1_18.1@107.637,13 107.825,13 108.552,13.727 108.552,13.915 109.308,14.671 R8_18.1@109.308,16.981
NetCN1_19_1: CN1_19.1 R8_19.1 | length 4.8
  Top Layer w0.3: CN1_19.1@99.137,13 99.325,13 100.052,13.727 100.052,13.915 100.808,14.671 R8_19.1@100.808,16.981
NetCN1_20_1: CN1_20.1 R8_20.1 | length 4.8
  Top Layer w0.3: CN1_20.1@90.637,13 90.825,13 91.552,13.727 91.552,13.915 92.308,14.671 R8_20.1@92.308,16.981
NetCN1_21_1: CN1_21.1 R8_21.1 | length 4.8
  Top Layer w0.3: CN1_21.1@82.137,13 82.325,13 83.052,13.727 83.052,13.915 83.808,14.671 R8_21.1@83.808,16.981
NetCN1_22_1: CN1_22.1 R8_22.1 | length 4.8
  Top Layer w0.3: CN1_22.1@73.637,13 73.825,13 74.552,13.727 74.552,13.915 75.308,14.671 R8_22.1@75.308,16.981
NetCN1_23_1: CN1_23.1 R8_23.1 | length 4.8
  Top Layer w0.3: CN1_23.1@65.137,13 65.325,13 66.052,13.727 66.052,13.915 66.808,14.671 R8_23.1@66.808,16.981
NetCN1_24_1: CN1_24.1 R8_24.1 | length 4.8
  Top Layer w0.3: CN1_24.1@56.637,13 56.825,13 57.552,13.727 57.552,13.915 58.308,14.671 R8_24.1@58.308,16.981
NetCN1_25_1: CN1_25.1 R8_25.1 | length 4.8
  Top Layer w0.3: CN1_25.1@48.137,13 48.325,13 49.052,13.727 49.052,13.915 49.808,14.671 R8_25.1@49.808,16.981
NetCN1_26_1: CN1_26.1 R8_26.1 | length 4.8
  Top Layer w0.3: CN1_26.1@39.637,13 39.825,13 40.552,13.727 40.552,13.915 41.308,14.671 R8_26.1@41.308,16.981
NetCN1_27_1: CN1_27.1 R8_27.1 | length 4.8
  Top Layer w0.3: CN1_27.1@31.137,13 31.325,13 32.052,13.727 32.052,13.915 32.808,14.671 R8_27.1@32.808,16.981
NetCN1_28_1: CN1_28.1 R8_28.1 | length 4.8
  Top Layer w0.3: CN1_28.1@22.637,13 22.825,13 23.552,13.727 23.552,13.915 24.308,14.671 R8_28.1@24.308,16.981
NetD1_1: D1.1 R2.1 | length 2.1
  Top Layer w0.3: R2.1@99.098,51.4 99.1,51.402 D1.1@99.1,53.5
NetFB1_2: FB1.2 R2.2 | length 2.6
  Top Layer w0.3: R2.2@99.098,49.45 FB1.2@101.7,49.45
NetH2_1: H2.1 R29.2 | length 3.1
  Top Layer w0.3: R29.2@50.1,29.8 H2.1@53.16,29.8
NetLED2_2: LED2.2 R13.1 | length 8.2
  Top Layer w0.3: LED2.2@11.8,18.8 11.8,20.584 11.775,20.609 11.775,25.45 12.65,26.325 R13.1@12.65,26.6
NetLED3_1: LED3.1 R30.2 | length 2.6
  Top Layer w0.3: R30.2@109.5,49.4 LED3.1@112.1,49.4
NetLED4_2: LED4.2 R37.1 | length 2.6
  Top Layer w0.3: R37.1@112.2,62.4 LED4.2@114.8,62.4
NetQ3_2: Q3.2 R24.2 R25.2 | length 4.6
  Top Layer w0.3: Q3.2@9.9,68.6 9.913,68.587 9.913,64.013 R24.2@9.925,64
NetQ3_3: Q3.3 R18.1 R19.1 R23.1 | length 7.5
  Top Layer w0.3: Q3.3@10.9,70.6 10.9,71.55 11.675,72.325 R23.1@11.675,72.6 R19.1@11.675,75.2 R18.1@11.675,77.8
NetR3_1_1: R3_1.1 U1_1.7 | length 9.4
  Top Layer w0.3: U1_1.7@73.52,75.5 73.52,74.816 73.682,74.654 73.746,74.654 74.4,74 78.822,74 80.822,72 R3_1.1@81.097,72
NetR3_2_1: R3_2.1 U1_2.7 | length 9.4
  Top Layer w0.3: U1_2.7@91.52,75.5 91.52,74.816 91.682,74.654 91.746,74.654 92.4,74 96.822,74 98.822,72 R3_2.1@99.097,72
NetR3_3_1: R3_3.1 U1_3.7 | length 9.4
  Top Layer w0.3: U1_3.7@109.52,75.5 109.52,74.816 109.682,74.654 109.746,74.654 110.4,74 114.822,74 116.822,72 R3_3.1@117.097,72
NetR3_4_1: R3_4.1 U1_4.7 | length 9.4
  Top Layer w0.3: U1_4.7@127.52,75.5 127.52,74.816 127.682,74.654 127.746,74.654 128.4,74 132.822,74 134.822,72 R3_4.1@135.097,72
NetR3_5_1: R3_5.1 U1_5.7 | length 9.8
  Top Layer w0.3: R3_5.1@120.145,38 120.42,38 122.62,35.8 127.3,35.8 127.659,35.441 127.659,34.216 U1_5.7@127.675,34.2
NetR3_6_1: R3_6.1 U1_6.7 | length 9.8
  Top Layer w0.3: R3_6.1@102.15,38 102.425,38 104.625,35.8 109.305,35.8 109.664,35.441 109.664,34.216 U1_6.7@109.68,34.2
NetR3_7_1: R3_7.1 U1_7.7 | length 9.8
  Top Layer w0.3: R3_7.1@84.15,38 84.425,38 86.625,35.8 91.305,35.8 91.664,35.441 91.664,34.216 U1_7.7@91.68,34.2
NetR3_8_1: R3_8.1 U1_8.7 | length 9.8
  Top Layer w0.3: R3_8.1@66.15,38 66.425,38 68.625,35.8 73.305,35.8 73.664,35.441 73.664,34.216 U1_8.7@73.68,34.2
NetR4_1_1: R4_1.1 U1_1.6 | length 8.2
  Top Layer w0.3: U1_1.6@72.25,75.5 72.25,74.816 73.566,73.5 76.796,73.5 78.296,72 R4_1.1@78.571,72
NetR4_2_1: R4_2.1 U1_2.6 | length 8.2
  Top Layer w0.3: U1_2.6@90.25,75.5 90.25,74.816 91.566,73.5 94.796,73.5 96.296,72 R4_2.1@96.571,72
NetR4_3_1: R4_3.1 U1_3.6 | length 8.2
  Top Layer w0.3: U1_3.6@108.25,75.5 108.25,74.816 109.566,73.5 112.796,73.5 114.296,72 R4_3.1@114.571,72
NetR4_4_1: R4_4.1 U1_4.6 | length 8.2
  Top Layer w0.3: U1_4.6@126.25,75.5 126.25,74.816 127.566,73.5 130.796,73.5 132.296,72 R4_4.1@132.571,72
NetR4_5_1: R4_5.1 U1_5.6 | length 8.6
  Top Layer w0.3: R4_5.1@122.671,38 122.946,38 124.646,36.3 128.1,36.3 128.944,35.456 U1_5.6@128.945,34.2 U1_5.6@128.945,34.2
NetR4_6_1: R4_6.1 U1_6.6 | length 8.6
  Top Layer w0.3: R4_6.1@104.676,38 104.951,38 106.651,36.3 110.105,36.3 110.949,35.456 110.949,34.201 U1_6.6@110.95,34.2
NetR4_7_1: R4_7.1 U1_7.6 | length 8.6
  Top Layer w0.3: R4_7.1@86.676,38 86.951,38 88.651,36.3 92.105,36.3 92.949,35.456 U1_7.6@92.95,34.2 U1_7.6@92.95,34.2
NetR4_8_1: R4_8.1 U1_8.6 | length 8.6
  Top Layer w0.3: R4_8.1@68.676,38 68.951,38 70.651,36.3 74.105,36.3 74.949,35.456 U1_8.6@74.95,34.2 U1_8.6@74.95,34.2
NetR5_1_1: R5_1.1 U1_1.5 | length 6.9
  Top Layer w0.3: U1_1.5@70.98,75.5 70.98,74.813 72.793,73 74.77,73 75.77,72 R5_1.1@76.045,72
NetR5_2_1: R5_2.1 U1_2.5 | length 6.9
  Top Layer w0.3: U1_2.5@88.98,75.5 88.98,74.813 90.793,73 92.77,73 93.77,72 R5_2.1@94.045,72
NetR5_3_1: R5_3.1 U1_3.5 | length 6.9
  Top Layer w0.3: U1_3.5@106.98,75.5 106.98,74.813 108.793,73 110.77,73 111.77,72 R5_3.1@112.045,72
NetR5_4_1: R5_4.1 U1_4.5 | length 6.9
  Top Layer w0.3: U1_4.5@124.98,75.5 124.98,74.813 126.793,73 128.77,73 129.77,72 R5_4.1@130.045,72
NetR5_5_1: R5_5.1 U1_5.5 | length 7.3
  Top Layer w0.3: R5_5.1@125.197,38 125.472,38 126.672,36.8 128.865,36.8 130.212,35.454 130.212,34.203 U1_5.5@130.215,34.2